# Allegro board 8266-OLED-TIMER-MAX.brd
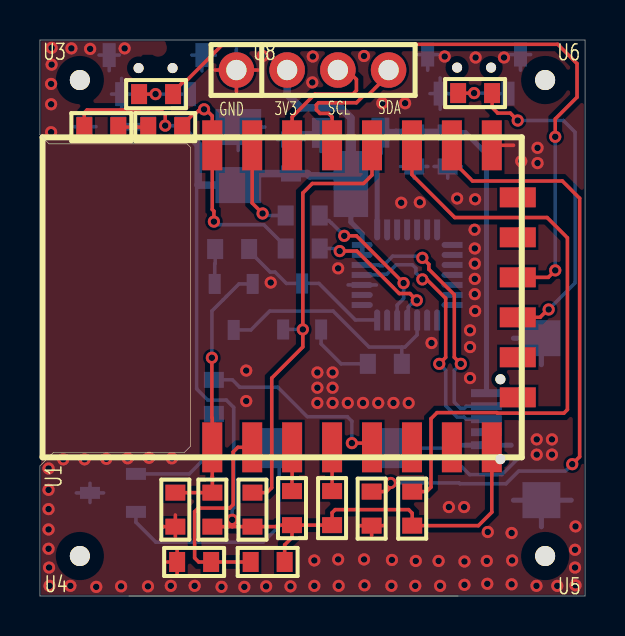
[diagram p0: board, top side]
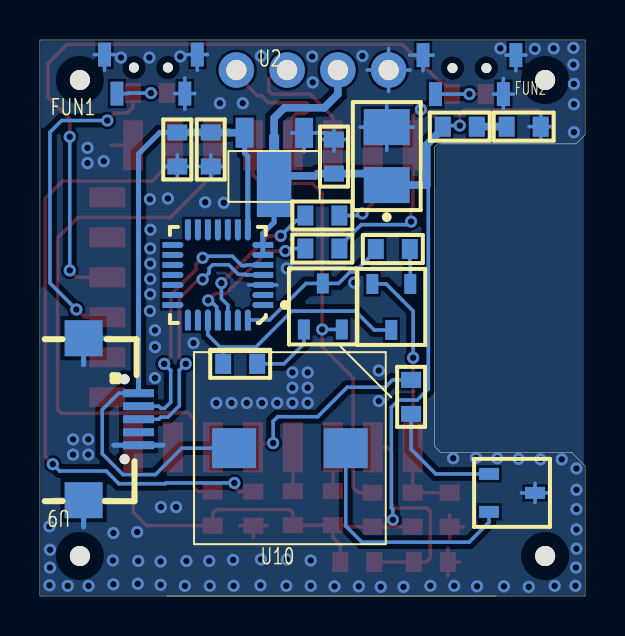
[diagram p1: board, bottom side, seen from below]

Outline 27.3 x 27.8 mm; copper layers: TOP, BOTTOM. Coordinates in mm from the lower left corner of the outline.
Outline path: 4.45,0 20.95,0 ; 0,27.8 0,23.06 0.46,22.61 7.37,22.61 7.54,22.43 7.54,7.49 7.24,7.19 0.69,7.19 0,6.5 0,0 27.3,0 27.3,27.8 0,27.8

## Design rules (mm)
net group DIFFPAIR1: nets DN DP
net group DIFFPAIR3: nets SCL SDA
net group DIFFPAIR4: nets N136309 RXD0

## Placement (name value [footprint] x y rotation side)
C1  0.1u  [SMD0603]  18.75 22.33 270 bottom
C2  0.1u  [SMD0603]  12.57 21.97 90 bottom
C3  100nF  [SMD0603]  6.78 4.32 270 top
C5  0.1u  [SMD0603]  20.42 22.33 270 bottom
C6  100uF  [SMDC3528]  9.93 22 90 bottom
D1  LED  [SMD0603]  3.07 23.47 0 bottom
D2  LED  [SMD0603]  6.27 23.44 180 top
FUN1  KEY  [2_4_3P5_KEY]  21.74 25.12 180 bottom
FUN2  KEY  [2_4_3P5_KEY]  5.79 25.1 180 bottom
Q1  S8050  [SOT23-3]  9.7 14.45 270 bottom
Q2  S8050  [SOT23-3]  13.13 14.48 90 bottom
Q3  S8050  [SOT23-3]  3.66 5.16 180 bottom
R1  10K  [SMD0603]  10.64 4.32 90 top
R2  10K  [SMD0603]  18.64 4.37 90 top
R3  470  [SMD0603]  14.63 4.39 90 top
R4  10K  [SMD0603]  8.64 4.32 90 top
R5  10K  [SMD0603]  12.62 4.39 90 top
R6  12K  [SMD0603]  11.4 1.7 180 top
R7  12K  [SMD0603]  16.61 4.37 270 top
R8  12K  [SMD0603]  7.72 1.7 180 top
R9  470  [SMD0603]  21.79 25.15 0 top
R10  1K  [SMD0603]  6.27 23.47 0 bottom
R11  470  [SMD0603]  3.07 23.44 180 top
R12  12K  [SMD0603]  9.63 17.35 0 bottom
R13  470  [SMD0603]  13.16 17.37 180 bottom
R14  470  [SMD0603]  5.82 25.1 0 top
R15  12K  [SMD0603]  8.71 9.96 270 bottom
R16  12K  [SMD0603]  17.27 11.61 0 bottom
R17  470  [SMD0603]  13.16 19.02 180 bottom
U1  ESP8266  [8266]  24.13 6.93 90 top
U2  LM1117F-3.3  [SOT89]  14.07 22.66 270 bottom
U3  1PIN  [HOLE_2MM]  2 25.8 0 top
U4  1PIN  [HOLE_2MM]  2 2 0 top
U5  1PIN  [HOLE_2MM]  25.3 2 0 top
U6  1PIN  [HOLE_2MM]  25.3 25.8 0 top
U7  CP2102  [QFN28]  18.39 16.05 0 bottom
U8  4PIN  [SIP4]  9.84 26.3 0 top
U9  7PIN  [MICROUSB]  24.56 8.84 270 bottom
U10  2PIN  [9650B]  14.78 7.39 0 bottom

## Library data of the parts
C1-C3 C5 = CAP NP
C6 = CAP
D1 D2 = LED
FUN1 FUN2 = KEY_1
Q1-Q3 = NPN BCE
R1-R17 = R
U1 = 8266_0
U2 = lm1117f-3_0.3
U3-U6 = 1PIN
U7 = CP2102_2
U8 = 4PIN
U9 = 7PIN
U10 = 2PIN

## Footprints (pads in the part's own frame, mm; a bottom-side part is the same pattern mirrored in y, then rotated)
2_4_3P5_KEY
  round 0.5 hole 0.749 unplated: (-0.851,1.3) (0.851,1.3)
  rect 0.65x1.199 smd: 1(-1.699,0) 2(1.699,0) 3(-2.324,1.951) 4(2.324,1.951)
8266
  rect 2.499x1.001 smd: 1(0.5,15.499) 2(0.5,13.5) 3(0.5,11.501) 4(0.5,9.5) 5(0.5,7.501) 6(0.5,5.499) 7(0.5,3.5) 8(0.5,1.501) 15(15.601,1.501) 16(15.601,3.5) 17(15.601,5.499) 18(15.601,7.501) 19(15.601,9.5) 20(15.601,11.501) 21(15.601,13.5) 22(15.601,15.499)
  rect 1.001x1.801 smd: 9(3,0.201) 10(5.001,0.201) 11(7,0.201) 12(8.999,0.201) 13(11.001,0.201) 14(13,0.201)
9650B
  rect 2.2x1.999 smd: 1(-2.799,0) 2(2.799,0)
HOLE_2MM
  round 1.001 hole 1.999 unplated: (0,0)
MICROUSB
  round 0.5 hole 0.5 unplated: (-1.999,1.501) (1.999,1.501)
  rect 0.399x1.549 smd: 1(-1.3,2.2) 2(-0.65,2.2) 3(0,2.2) 4(0.65,2.2) 5(1.3,2.2)
  rect 1.801x1.9 smd: 6(-4.049,-0.551) 7(4.049,-0.551)
QFN28
  custom 1.052x0.3 smd: 1(-2.25,1.501) 2(-2.25,1.001) 3(-2.25,0.5) 4(-2.25,0) 5(-2.25,-0.5) 6(-2.25,-1.001) 7(-2.25,-1.501) 15(2.25,-1.501) 16(2.25,-1.001) 17(2.25,-0.5) 18(2.25,0) 19(2.25,0.5) 20(2.25,1.001) 21(2.25,1.501)
  custom 0.3x1.052 smd: 8(-1.501,-2.25) 9(-1.001,-2.25) 10(-0.5,-2.25) 11(0,-2.25) 12(0.5,-2.25) 13(1.001,-2.25) 14(1.501,-2.25) 22(1.501,2.25) 23(1.001,2.25) 24(0.5,2.25) 25(0,2.25) 26(-0.5,2.25) 27(-1.001,2.25) 28(-1.501,2.25)
SIP4
  round 1.778 hole 1.016: 1(0,0) 2(2.54,0) 3(5.08,0) 4(7.62,0)
SMD0603
  rect 0.8x1.001 smd: 1(-0.851,0) 2(0.851,0)
SMDC3528
  rect 1.801x2.301 smd: 1(-1.45,0) 2(1.45,0)
SOT23-3
  rect 1.001x0.599 smd: 1(-1.151,0.95) 2(-1.151,-0.95) 3(1.151,0)
SOT89
  rect 1.501x0.899 smd: 1(-0.5,0) 3(-0.511,-2.979)
  custom 4.115x1.727 smd: 2(1.651,-1.501)

## Nets
3V3: C2.1 C6.1 R1.1 R2.1 R3.1 R4.1 R5.1 R6.1 R10.2 R11.2 U1.8(VDD) U2.2(OUT) U7.6(VDD) U7.7(REGIN) U8.2
5V: C1.1 C5.1 U2.3(IN) U7.8(VBUS) U9.1 U10.2(B-)
0: C1.2 C2.2 C3.2 C5.2 C6.2 D1.1(CATHODE) FUN1.2 FUN1.3 FUN1.4 FUN2.2 FUN2.3 FUN2.4 Q3.3(E) R7.2 R8.2 U1.15(GND) U2.1(GND) U7.3(GND1) U8.1 U9.5 U9.6 U9.7
ADC: R6.2 R8.1 U1.2(ADC)
DN: U7.5(D-) U9.2
DP: U7.4(D+) U9.3
DTR: Q2.3(E) R12.2 U7.28(DTR)
EN: R5.2 U1.3(EN)
GPIO0: Q2.2(C) R1.2 U1.18(GPIO0)
GPIO2: R2.2 U1.17(GPIO2)
GPIO9: R9.2 U1.11(GPIO9)
GPIO10: R14.2 U1.12(GPIO10)
GPIO12: U1.6(GPIO12)
GPIO14: R15.1 U1.5(GPIO14)
GPIO15: R7.1 U1.16(GPIO15)
NRST: C3.1 Q1.2(C) R4.2 U1.1(RST)
RTS: Q1.3(E) R16.2 U7.24(RTS)
RXD0: R17.2 U1.21(RXD0)
SCL: U1.20(GPIO5) U8.3
SDA: U1.19(GPIO4) U8.4
TXD0: D2.1(CATHODE) R13.2 U1.22(TXD0)
N95302: R3.2 U1.4(GPIO16)
N129374: D1.2(ANODE) R10.1
N136309: R13.1 U7.25(RXD)
N136318: R17.1 U7.26(TXD)
N137451: Q1.1(B) R12.1
N142546: D2.2(ANODE) R11.1
N142892: FUN1.1 R9.1
N144693: FUN2.1 R14.1
N146946: Q3.2(C) U10.1(B+)
N146953: Q3.1(B) R15.2
N147782: Q2.1(B) R16.1

Pads without a net: U1 7 9 10 13 14; U7 1 2 9 10 11 12 13 14 15 16 17 18 19 20 21 22 23 27; U9 4

## Via types
v1: diameter 0.61, hole 0.33, TOP to BOTTOM, 128 vias

## Routing (per net, layer and track width the routed paths; a pad name or vN(x,y) marks a point on that pad's centre or on a via; arc(x,y) is an arc through that point)
3V3: length 68.9
  TOP w0.178: v1(6.27,23.52) 6.27,24.08 6.05,24.3 2.36,24.3 2.22,24.16 R11.2 ; 9.63,3.47 R1.1 11.83,3.47 11.9,3.54 R5.1 ; 9.63,3.47 R4.1 ; 9.63,3.47 v1(9.63,3.81) ; R5.1 R3.1 14.63,4.16 14.79,4.32 18.46,4.32 18.64,4.14 R2.1 21.96,3.52 22.63,4.19 U1.8 ; R5.1 12.62,2.92 12.26,2.56 R6.1
  BOTTOM w0.178: 7.92,20.56 7.85,20.49 7.85,10.36 8.4,9.8 9.33,9.8 9.7,9.43 9.7,4.41 9.63,4.33 v1(9.63,3.81) ; R10.2 7.07,23.52 v1(6.27,23.52)
  BOTTOM w0.254: U2.2 15.57,18.69 16.14,18.12 U7.7 U7.6
  BOTTOM w0.381: U8.2 12.38,25.09 13.06,24.41 15.06,24.41 15.57,23.9 U2.2 13.51,21.01 13.39,21.12 C2.1 10.51,21.12 C6.1 7.94,20.55 7.92,20.56 7.92,22.57 7.12,23.37 R10.2
5V: length 34.6
  BOTTOM w0.178: U10.2 20.19,7.39 21.51,6.07 23.14,6.07 24.18,7.11 24.18,9.31 23.36,10.14 U9.1
  BOTTOM w0.254: C5.1 21.3,23.18 22.36,22.11 U9.1 ; U7.8 16.89,21.99 17.05,22.16 U2.3
  BOTTOM w0.381: U2.3 17.82,23.17 17.83,23.18 C1.1 C5.1
0: length 58.3
  TOP w0.178: 8.77,26.3 U8.1 ; U8.1 9.84,25.23 ; U8.1 10.91,26.3 ; 6.78,2.88 C3.2 ; C3.2 6.1,3.47 ; C3.2 6.78,4.05 ; 23.72,22.53 U1.15 ; 6.29,1.7 R8.2 ; R8.2 6.87,2.39 ; R8.2 6.87,1.02 ; 16.61,2.93 R7.2 ; R7.2 17.29,3.52 ; R7.2 15.93,3.52
  BOTTOM w0.178: 3.47,26.26 FUN2.4 ; FUN2.4 3.98,27.05 ; FUN2.4 2.96,27.05 ; C1.2 19.43,21.48 ; C1.2 18.75,22.06 ; C1.2 18.75,20.89 ; C1.2 18.06,21.48 ; 4.09,24.31 FUN2.2 ; FUN2.2 3.58,25.1 ; FUN2.2 4.6,25.1 ; FUN2.2 4.09,25.88 ; C5.2 21.1,21.48 ; C5.2 20.42,20.89 ; C5.2 20.42,22.06 ; C5.2 19.74,21.48 ; 16.85,15.55 U7.3 15.43,15.55 ; U2.1 14.7,23.16 ; U2.1 12.91,23.16 C2.2 ; U2.1 14.07,22.22 ; 1.64,23.47 D1.1 ; D1.1 2.22,22.79 ; D1.1 2.22,24.15 ; D1.1 2.81,23.47 ; 9.93,22.28 C6.2 ; C6.2 9.93,24.53 ; C6.2 8.6,23.45 ; C6.2 11.26,23.45 ; 20.04,24.34 FUN1.2 ; FUN1.2 20.55,25.12 ; FUN1.2 19.54,25.12 ; FUN1.2 20.04,25.9 ; Q3.3 2.51,5.64 ; Q3.3 2.51,4.67 ; Q3.3 1.82,5.16 ; Q3.3 3.19,5.16 ; 19.42,26.29 FUN1.4 ; FUN1.4 18.91,27.07 ; FUN1.4 19.93,27.07 ; 8.77,26.3 U8.1 ; U8.1 9.84,27.37 ; U8.1 9.84,25.23 ; U8.1 10.91,26.3 ; 7.61,27.05 FUN2.3 ; FUN2.3 8.12,26.26 ; FUN2.3 8.78,27.05 ; C2.2 13.26,22.82 ; C2.2 11.89,22.82 ; C2.2 12.57,23.41 ; C2.2 12.57,22.24 ; 23.56,27.07 FUN1.3 ; FUN1.3 24.57,27.07 ; FUN1.3 24.07,26.29
  BOTTOM w0.254: U9.7 25.11,3.46 ; U9.7 26.61,4.79 ; U9.7 23.71,4.79 ; 21.14,7.54 U9.5 23.6,7.54 ; 23.71,12.89 U9.6 25.11,11.56
  vias: v1(0.43,6.38) v1(0.43,5.31) v1(0.43,4.34) v1(0.43,3.33) v1(0.43,2.36) v1(0.46,1.42) v1(0.48,0.51) v1(0.58,27.41) v1(0.58,26.57) v1(0.56,25.6) v1(0.56,24.59) v1(0.56,23.19) v1(1.17,6.83) v1(1.52,0.51) v1(1.57,27.38) v1(2.24,6.83) v1(2.51,27.36) v1(2.82,0.46) v1(3.33,6.86) v1(4.06,0.48) v1(4.24,27.38) v1(4.39,6.88) v1(5.41,0.48) v1(5.46,6.91) v1(6.6,6.88) v1(6.55,0.51) v1(7.75,0.51) v1(9.09,0.46) v1(10.24,0.46) v1(10.33,11.27) v1(10.33,9.75) v1(11.15,27) v1(11.33,0.48) v1(11.56,15.67) v1(12.55,0.48) v1(13.64,25.68) v1(13.67,26.97) v1(13.74,1.78) v1(13.74,0.51) v1(13.89,11.18) v1(13.89,10.41) v1(13.89,9.65) v1(14.66,11.18) v1(14.66,10.41) v1(14.66,9.65) v1(14.94,16.38) v1(14.94,1.83) v1(14.96,0.51) v1(15.42,9.65) v1(16.23,27) v1(16.18,9.65) v1(16.23,1.83) v1(16.26,0.53) v1(16.94,9.65) v1(17.14,24.64) v1(17.63,1.8) v1(17.6,0.51) v1(17.7,9.65) v1(18.09,19.66) v1(18.29,24.64) v1(18.47,9.65) v1(18.82,1.75) v1(18.8,0.51) v1(19.02,19.68) v1(19.61,12.65) v1(19.96,1.75) v1(20.04,0.51) v1(20.27,26.97) v1(20.48,4.45) v1(20.89,19.88) v1(21.24,4.45) v1(21.26,1.73) v1(21.26,0.56) v1(21.54,13.28) v1(21.54,12.45) v1(21.54,10.9) v1(21.82,26.92) v1(21.79,19.84) v1(21.77,18.31) v1(21.78,17.38) v1(21.78,16.62) v1(21.78,15.85) v1(21.78,15.09) v1(21.79,14.25) v1(22.43,3.2) v1(22.38,1.75) v1(22.4,0.61) v1(23.24,26.92) v1(23.62,3.15) v1(23.65,1.78) v1(23.62,0.58) v1(24.1,21.74) v1(24.92,22.41) v1(24.92,21.65) v1(24.88,7.83) v1(24.88,7.07) v1(24.87,0.51) v1(25.64,7.83) v1(25.64,7.07) v1(25.91,0.51) v1(26.82,3.48) v1(26.8,2.31) v1(26.8,1.42) v1(26.82,0.53)
ADC: length 11
  TOP w0.178: U1.2 9.91,7.43 9.68,7.2 9.68,4.57 9.5,4.39 7.92,4.39 7.75,4.22 7.75,1.91 7.95,1.7 R8.1 R6.2
DN: length 13.2
  TOP w0.178: v1(19.15,16.91) 19.48,16.58 19.48,16.34 20.75,15.06 20.75,11.93 v1(21.08,11.61)
  BOTTOM w0.178: v1(21.08,11.61) 20.75,11.28 20.75,9.69 21.06,9.38 21.24,9.38 21.35,9.49 U9.2 ; v1(19.15,16.91) 19.07,16.99 17.66,16.99 17.19,16.52 17.01,16.52 16.97,16.55 U7.5
DP: length 13.2
  TOP w0.178: v1(19.15,15.83) 19.37,15.83 20.32,14.88 20.32,11.93 v1(20,11.61)
  BOTTOM w0.178: U9.3 21.35,8.84 21.24,8.95 20.88,8.95 20.32,9.51 20.32,11.29 v1(20,11.61) ; v1(19.15,15.83) 18.83,16.15 18.83,16.38 18.65,16.56 17.84,16.56 17.37,16.09 17.01,16.09 16.98,16.05 U7.4
DTR: length 7.9
  BOTTOM w0.178: R12.2 10.48,17.25 11.53,16.2 11.78,16.2 12.34,15.63 Q2.3 13.97,15.63 15.8,13.8 U7.28
EN: length 2.2
  TOP w0.178: U1.3 12.63,5.87 12.62,5.86 R5.2
GPIO0: length 22.8
  TOP w0.178: U1.18 16.63,21.05 16.21,20.62 13.64,20.62 13.16,20.15 v1(13.16,13.33) 13.16,12.45 11.61,10.9 11.61,5.42 11.36,5.17 R1.2
  BOTTOM w0.178: Q2.2 v1(13.16,13.33)
GPIO2: length 30.6
  TOP w0.178: U1.17 18.63,21.07 20.77,18.92 25.4,18.92 26.42,17.91 26.42,9.32 26.24,9.14 22.91,9.14 22.88,9.17 19.89,9.17 19.58,8.86 19.58,5.44 19.36,5.22 R2.2
GPIO9: length 16.6
  TOP w0.178: v1(25.48,14.33) 25.48,14.36 25.05,13.93 U1.11 ; R9.2 22.64,24.43 22.93,24.15 23.56,24.15 v1(23.93,23.77)
  BOTTOM w0.178: v1(25.48,14.33) 26.8,15.65 26.8,23.19 26.21,23.77 v1(23.93,23.77)
GPIO10: length 34.5
  TOP w0.178: U1.12 25.46,15.93 v1(25.81,16.28) ; v1(25.81,22.96) 25.81,23.85 26.9,24.94 26.9,26.62 25.93,27.58 9.16,27.58 7.32,25.75 7.22,25.75 6.67,25.19 R14.2
  BOTTOM w0.178: v1(25.81,16.28) v1(25.81,22.96)
GPIO14: length 10
  TOP w0.178: v1(15.62,7.65) 16.42,7.65 U1.5
  BOTTOM w0.178: R15.1 9.64,10.81 10.01,10.44 11.91,10.44 13.39,8.97 15.39,8.97 15.62,8.74 v1(15.62,7.65)
GPIO15: length 32.1
  TOP w0.178: v1(26.66,6.59) 27.03,6.96 27.03,19.89 26.16,20.75 21.66,20.75 20.63,21.79 U1.16 ; v1(17.56,5.65) 17.56,5.45 17.33,5.22 R7.1
  BOTTOM w0.178: v1(17.56,5.65) 20.99,5.65 21.03,5.61 23.34,5.61 23.98,6.25 26.31,6.25 v1(26.66,6.59)
NRST: length 13.5
  TOP w0.178: v1(8.61,11.91) 8.61,8.92 8.63,8.9 U1.1 8.63,5.97 8.64,5.96 R4.2 C3.1
  BOTTOM w0.178: v1(8.61,11.91) 8.61,14.25 9.17,14.81 9.17,14.81 9.34,14.98 9.34,14.98 9.96,15.6 Q1.2
RTS: length 12.2
  BOTTOM w0.178: 18.12,12.45 16.48,12.45 14.68,14.25 11.51,14.25 10.56,13.3 Q1.3 ; 18.12,12.45 R16.2 ; 18.12,12.45 18.28,12.45 18.89,13.06 U7.24
RXD0: length 4.8
  TOP w0.178: U1.21 10.63,19.65 v1(11.15,19.13)
  BOTTOM w0.178: R17.2 11.25,19.02 v1(11.15,19.13)
SCL: length 7
  TOP w0.178: U1.20 12.63,23.95 13.77,25.1 15.67,25.1 15.85,25.27 15.85,25.83 15.28,26.41 15.03,26.41 U8.3
SDA: length 7.1
  TOP w0.178: U1.19 14.63,23.95 14.45,24.13 14.02,24.13 13.85,24.31 13.85,24.56 13.95,24.66 15.85,24.66 16.21,25.02 16.41,25.02 17.46,26.07 U8.4
TXD0: length 11.6
  TOP w0.178: D2.1 7.12,23.54 7.68,24.1 7.78,24.1 7.94,24.26 8.05,24.26 8.13,24.33 v1(8.22,24.33) 8.3,24.33 8.63,24 U1.22 8.63,19.32 8.71,19.24 v1(8.71,18.72)
  BOTTOM w0.178: v1(8.71,18.72) 8.86,18.57 11.21,18.57 12.31,17.47 R13.2
N95302: length 2.2
  TOP w0.178: U1.4 R3.2
N129374: length 1.5
  BOTTOM w0.381: R10.1 D1.2
N136309: length 7.2
  TOP w0.178: v1(15.01,17.25) 15.87,17.25 17.99,15.12 18.53,15.12 v1(18.87,14.78)
  BOTTOM w0.178: R13.1 14.88,17.37 v1(15.01,17.25) ; v1(18.87,14.78) 18.71,14.62 18.62,14.62 18.45,14.45 18.45,13.86 U7.25
N136318: length 7.6
  TOP w0.178: v1(18.21,15.65) 15.85,18.01 v1(15.24,18.01)
  BOTTOM w0.178: v1(18.21,15.65) 18.21,14.87 17.89,14.55 U7.26 ; R17.1 14.01,18.95 14.19,18.77 14.47,18.77 14.59,18.66 14.59,18.66 v1(15.24,18.01)
N137451: length 1.8
  BOTTOM w0.178: R12.1 8.78,16.63 8.75,16.61 Q1.1
N142546: length 1.5
  TOP w0.178: D2.2 R11.1
N142892: length 2.5
  TOP w0.178: R9.1 v1(21.74,25.15)
  BOTTOM w0.178: FUN1.1 22.9,25.12 22.87,25.15 v1(21.74,25.15)
N144693: length 2.5
  TOP w0.178: R14.1 v1(5.79,25.1)
  BOTTOM w0.178: v1(5.79,25.1) FUN2.1
N146946: length 12.3
  BOTTOM w0.178: U10.1 11.98,3.5 11.18,2.69 5.8,2.69 4.81,3.69 Q3.2
N146953: length 6.2
  BOTTOM w0.178: R15.2 8.71,7.34 7.48,6.11 Q3.1
N147782: length 3.5
  BOTTOM w0.178: Q2.1 14.08,12.61 15.08,11.61 R16.1

## Copper pours and planes (outline as drawn; the poured copper is in the pictures)
0 on TOP: 0.06,0.06 0.06,27.74 27.24,27.74 27.24,0.06 ; 5 cut-outs
0 on BOTTOM: 0.06,0.06 0.06,27.74 27.24,27.74 27.24,0.06 ; 5 cut-outs

## Text on the board
Ref Des/Silkscreen Top: GND | 3V3 | SCL | SDA
